# Altium PCB HA_MSS200529PCB.PcbDoc
Units mm, origin at the board's own origin, x right, y up, seen from the top; angles counter-clockwise.
Board outline 55 x 55 mm, 2 copper layers (Top Layer, Bottom Layer), stack 1.569 mm thick; 80 components, 47 nets, 249 pads, 13 vias.
Unrouted connection lines stored in the file: 158.
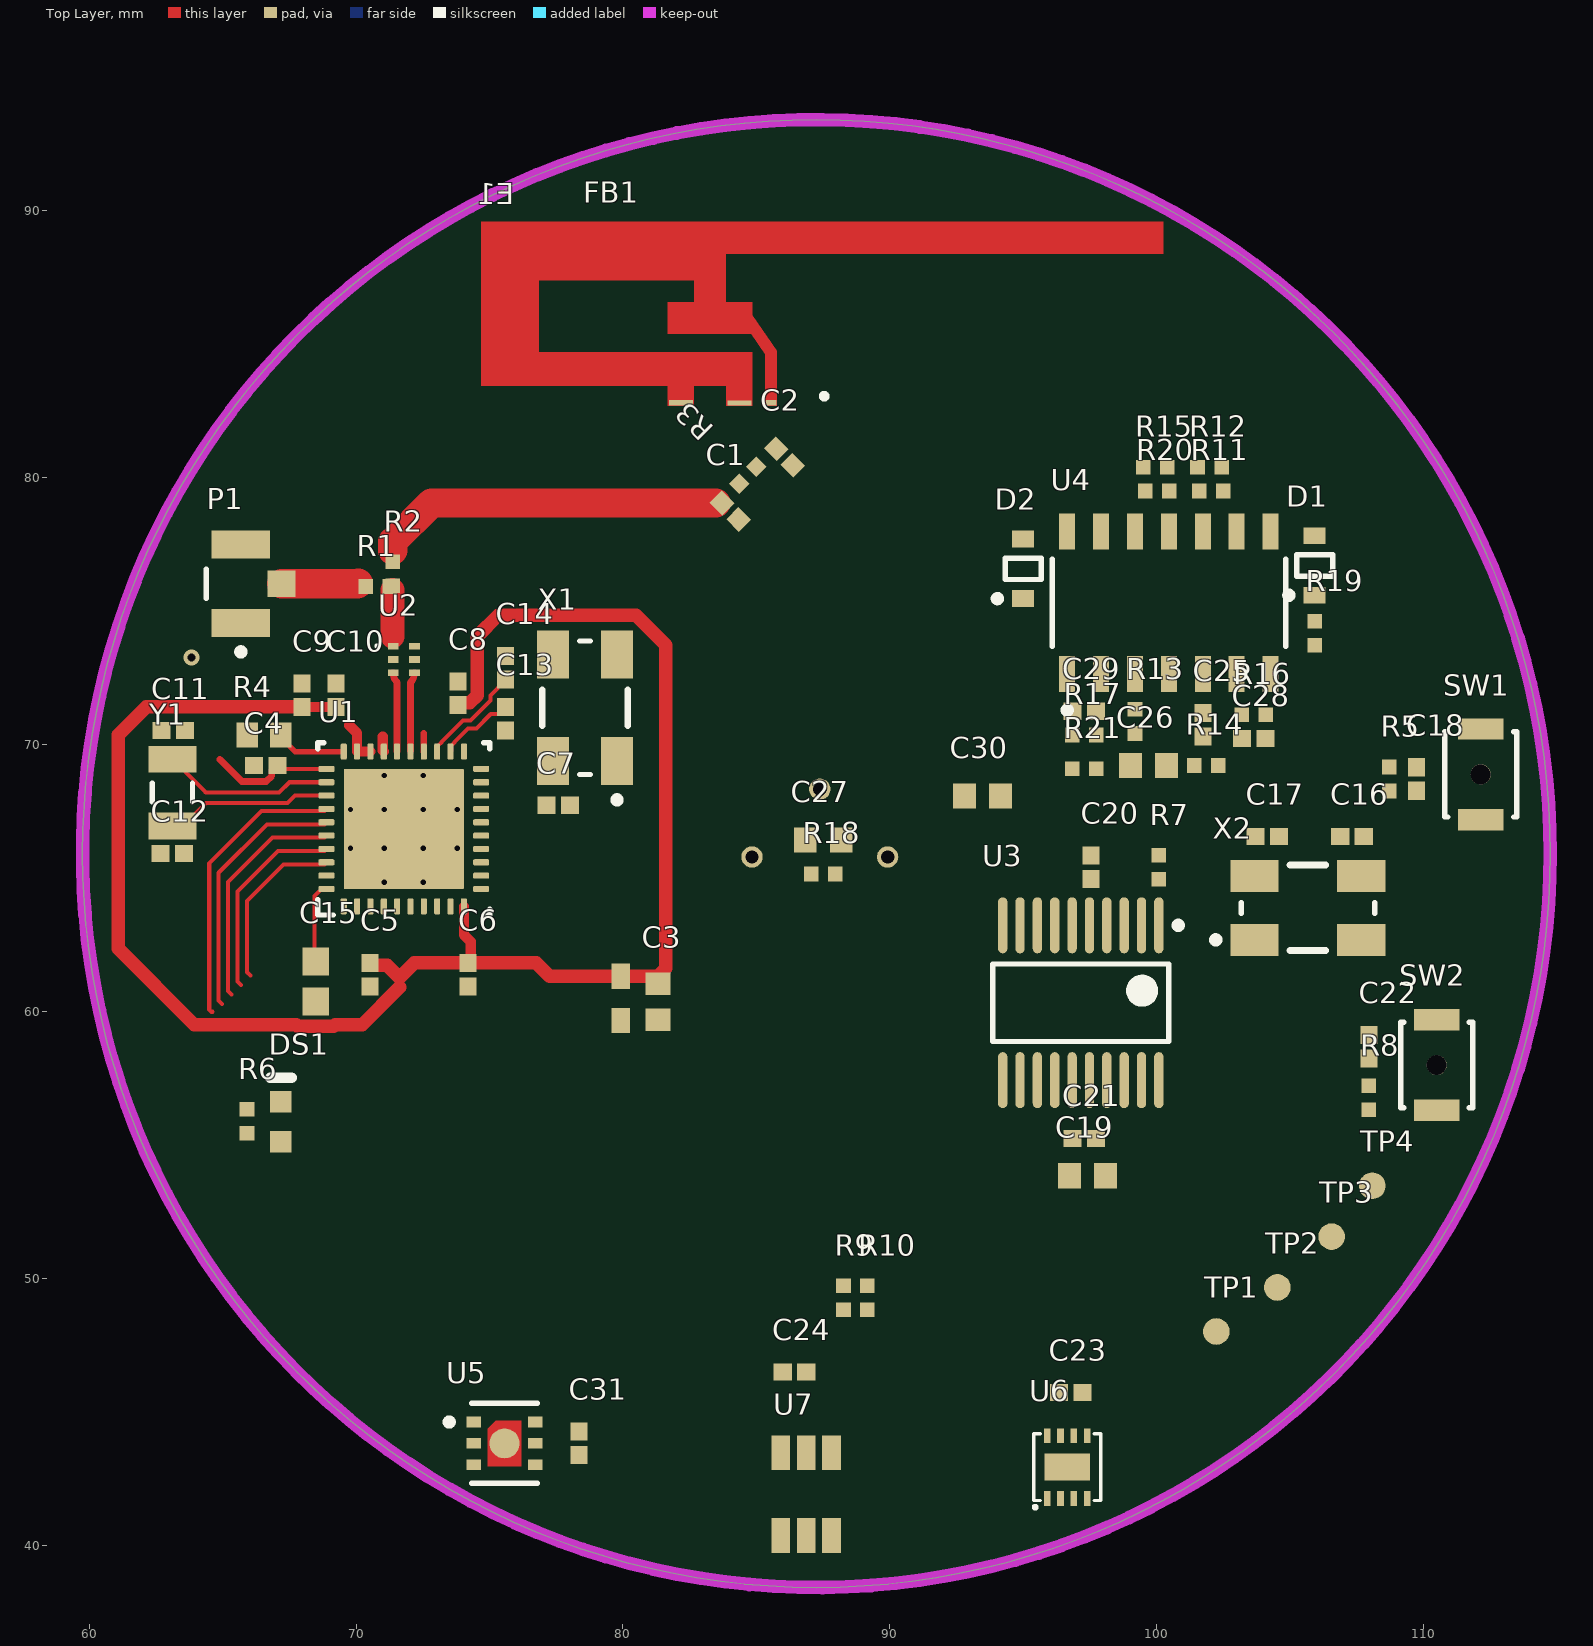
[diagram p0: Top Layer view]
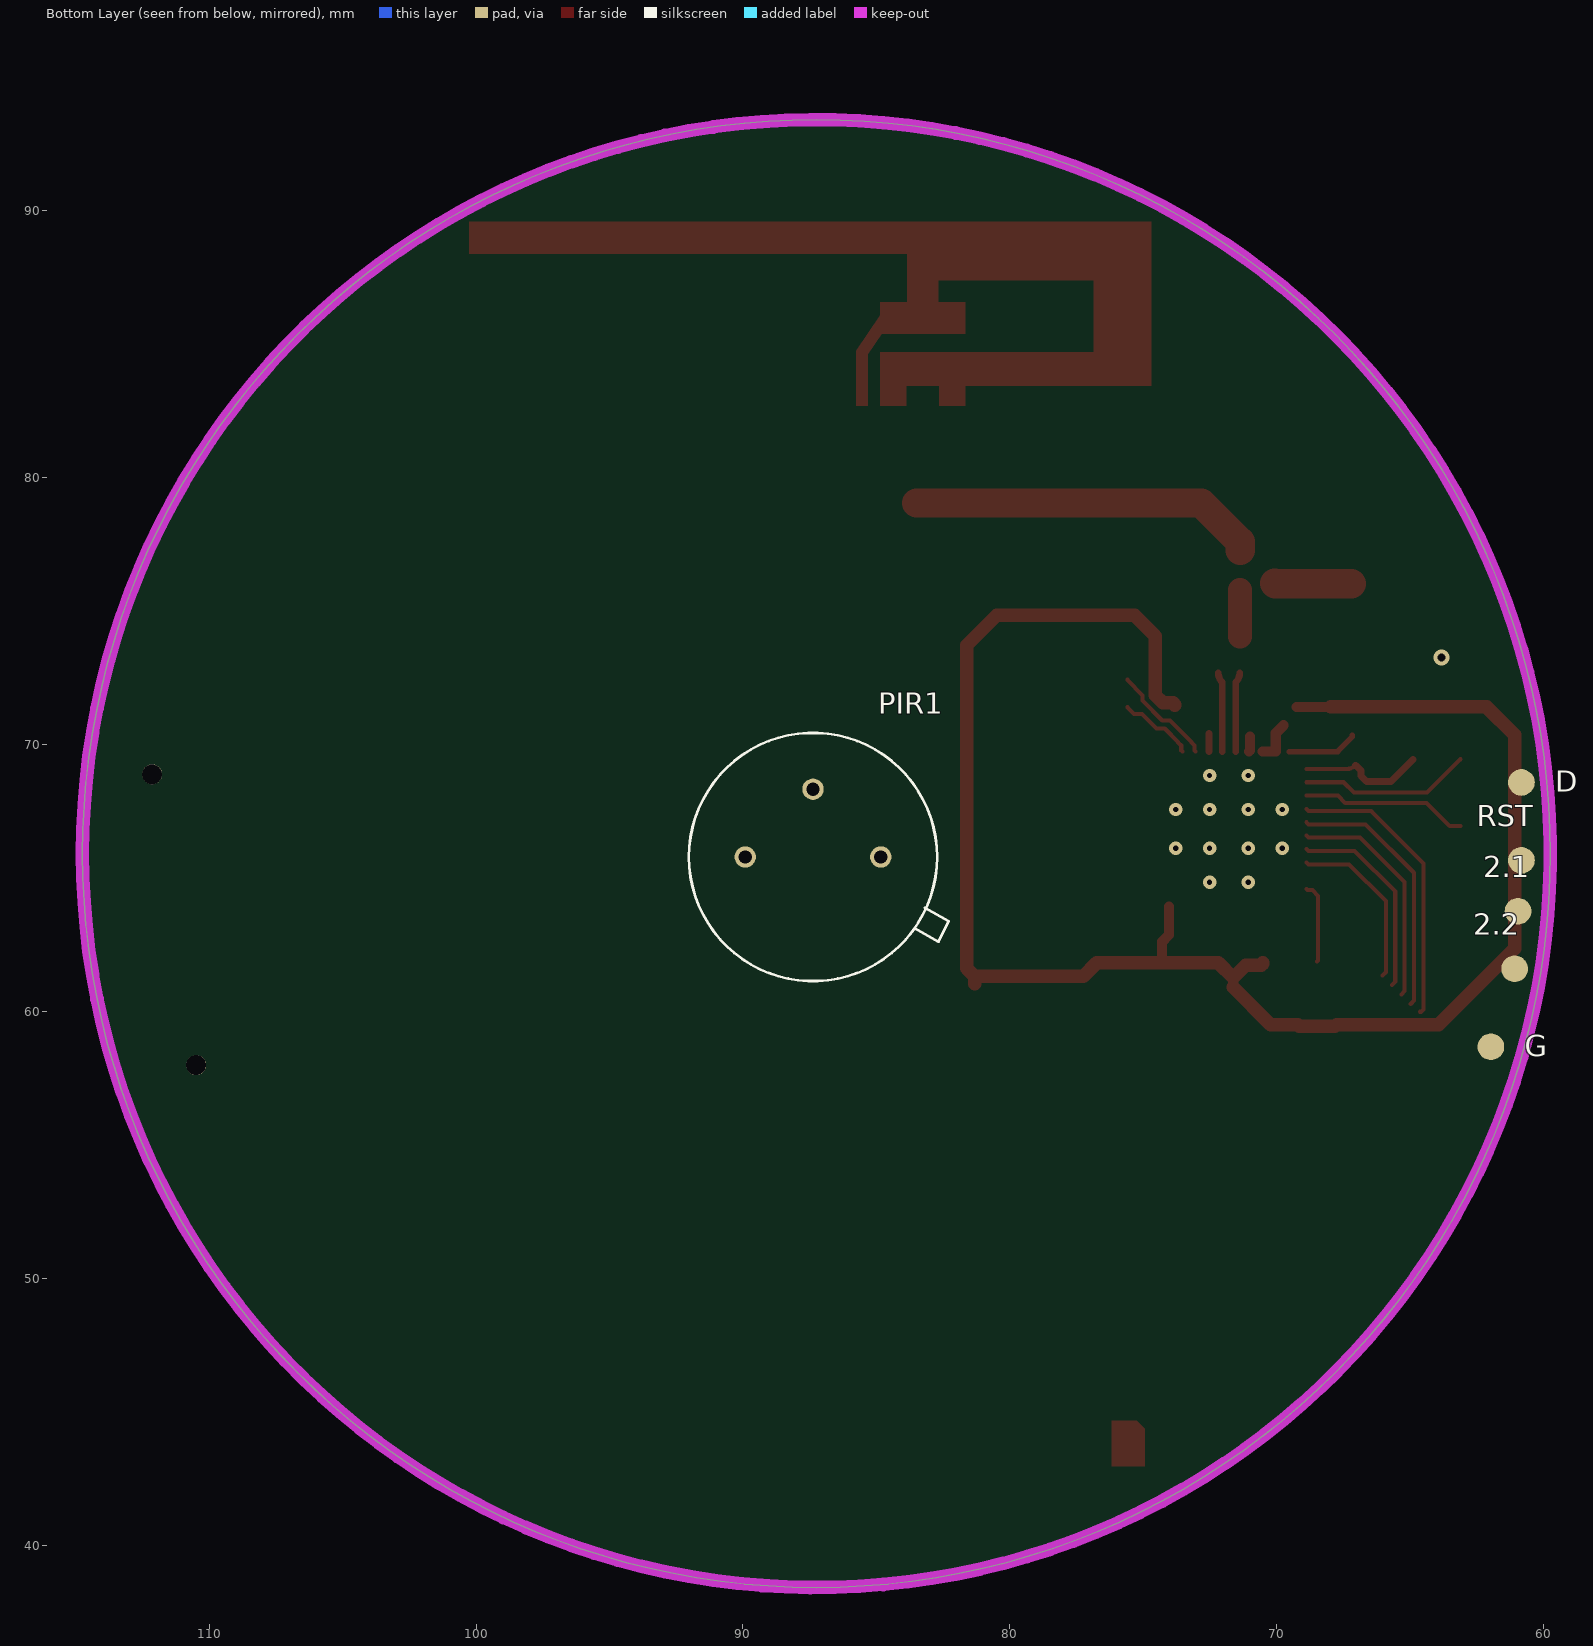
[diagram p1: Bottom Layer view, seen from below]

## Layer stack, top to bottom
Top Solder: solder mask 0.0254, SM-001, Dk 4
Top Layer: signal copper 0.035
Dielectric 1: core 1.4986, Core-043, Dk 4.3
Bottom Layer: signal copper 0.035
Bottom Solder: solder mask 0.0254, SM-001, Dk 4

## Board outline
59.749,65.913 ccw(c87.249,65.913) 87.249,38.413 ccw(c87.249,65.913) 114.749,65.913 ccw(c87.249,65.913) 87.249,93.413 ccw(c87.249,65.913)

## Design rules (kind name [scope] priority, off if disabled: settings)
Clearance [All] p1: gap=0.152 ignorepadtopadclearanceinfootprint=FALSE
PolygonConnect [All] p1: connectstyle=Relief reliefconductorwidth=0.254 reliefentries=4 polygonreliefangle="90 Angle" airgapwidth=0.254
RoomDefinition "04. SENSOR SHT30, PIR, TSL2561" [InComponentClass('04. SENSOR SHT30, PIR, TSL2561')] p1: confinementstyle=ConfineOut formatcopy=TRUE lockcomponents=FALSE outline 60.198,16.129 229.235,16.129 229.235,28.575 60.198,28.575
RoomDefinition "03. MCU" [InComponentClass('03. MCU')] p2: confinementstyle=ConfineOut formatcopy=TRUE lockcomponents=FALSE outline 60.198,31.115 78.232,31.115 78.232,35.687 60.198,35.687
RoomDefinition "02. ZIGBEE CC2530" [InComponentClass('02. ZIGBEE CC2530')] p3: confinementstyle=ConfineOut formatcopy=TRUE lockcomponents=FALSE outline 60.198,1.524 199.771,1.524 199.771,29.972 60.198,29.972
RoutingVias [All] p1: holewidth=0.711 width=1.27 viastyle="Through Hole" minholewidth=0.711 minwidth=1.27 maxholewidth=0.711 maxwidth=1.27
SolderMaskExpansion [All] p1: expansion=0.102 istentingtop=FALSE
Width [All] p1: maxlimit=2.54 minlimit=0.152 preferedwidth=0.254
30 further rules are at their usual default settings.

## Classes and differential pairs
component class "04. SENSOR SHT30, PIR, TSL2561": C23 C24 C25 C26 C27 C28 C29 C30 C31 D1 D2 PIR1 R9 R10 R11 R12 R13 R14 R15 R16 R17 R18 R19 R20 R21 U4 U5 U6 U7
component class "03. MCU": C16 C17 C19 C20 C21 C22 R7 R8 SW2 TP1 TP2 TP3 TP4 U3 X2
component class "02. ZIGBEE CC2530": 2.1 2.2 C1 C2 C3 C4 C5 C6 C7 C8 C9 C10 C11 C12 C13 C14 C15 C18 D DS1 E1 FB1 G P1 R1 R2 R3 R4 R5 R6 RST SW1 U1 U2 X1 Y1

## Components (designator, comment, footprint, x,y, rotation, side; value= is the part's Value field where it differs from the comment)
2.1 "Test Point" TP 60.96,63.754 r90 bottom
2.2 "Test Point" TP 61.087,61.595 r90 bottom
C1 "100nF" CAPC1005X56X25NL10T15 84.023,78.74 r135 top
C2 "100nF" CAPC1005X56X25NL10T15 86.055,80.772 r135 top
C3 "4.7uF" CAPC1608X90X35NL10T15 81.315,60.36 r90 top
C4 "100nF" CAPC1005X56X25NL10T15 66.616,69.215 r0 top
C5 "100nF" CAPC1005X56X25NL10T15 70.52,61.376 r90 top
C6 "100nF" CAPC1005X56X25NL10T15 74.203,61.376 r90 top
C7 "100nF" CAPC1005X56X25NL10T15 77.573,67.726 r180 top
C8 "100nF" CAPC1005X56X25NL10T15 73.822,71.917 r270 top
C9 "100nF" CAPC1005X56X25NL10T15 67.98,71.849 r270 top
C10 "100nF" CAPC1005X56X25NL10T15 69.25,71.849 r270 top
C11 "15pF" CAPC1005X56X25NL10T15 63.154,70.52 r0 top
C12 "15pF" CAPC1005X56X25NL10T15 63.119,65.913 r0 top
C13 "27pF" CAPC1005X56X25NL10T15 75.6,70.968 r90 top
C14 "27pF" CAPC1005X56X25NL10T15 75.6,72.873 r270 top
C15 "06036C225KAT2A" CAPC1608X90X35NL15T15 68.488,61.122 r90 top
C16 "27pF" CAPC1005X56X25NL10T15 107.315,66.548 r180 top
C17 "27pF" CAPC1005X56X25NL10T15 104.14,66.548 r0 top
C18 "100nF" CAPC1005X56X25NL10T15 109.728,68.707 r270 top
C19 "4.7uF" CAPC1608X90X35NL10T15 97.409,53.848 r0 top
C20 "100nF" CAPC1005X56X25NL10T15 97.536,65.405 r270 top
C21 "100nF" CAPC1005X56X25NL10T15 97.282,55.245 r0 top
C22 "100nF" CAPC1005X56X25NL10T15 107.95,58.674 r270 top
C23 "100nF" CAPC1005X56X25NL10T15 96.774,45.72 r0 top
C24 "100nF" CAPC1005X56X25NL10T15 86.428,46.482 r180 top
C25 "100nF" CAPC1005X56X25NL10T15 101.727,70.739 r270 top
C26 "10uF" CAPC1608X90X35NL10T15 99.695,69.215 r180 top
C27 "10uF" CAPC1608X90X35NL10T15 87.503,66.421 r0 top
C28 "100nF" CAPC1005X56X25NL10T15 103.632,70.231 r180 top
C29 "100nF" CAPC1005X56X25NL10T15 97.282,71.247 r0 top
C30 "10uF" CAPC1608X90X35NL10T15 93.472,68.072 r0 top
C31 "100nF" CAPC1005X56X25NL10T15 78.359,43.815 r90 top
D "Test Point" TP 60.833,68.58 r90 bottom
D1 "BAT54HT1G" ONSC-SOD-323-2-477-02_V 105.918,76.708 r90 top
D2 "BAT54HT1G" ONSC-SOD-323-2-477-02_V 94.996,76.581 r90 top
DS1 "HSMA-C190" AVAG-HSMX-C190_V 67.183,55.868 r90 top
E1 "ANTENNA_DN007A" "2.4Ghz TI ANTENNA_DN007A" 85.539,82.804 r180 top net-tie
FB1 "BLM18EG601SN1D" MURA-BLM18-F-H1-CHIP-2_V 79.918,60.487 r90 top
G "Test Point" TP 61.976,58.674 r90 bottom
P1 "U.FL-R-SMT-1(01)" HRS-U.FL-R-SMT-3_V 65.684,76.022 r90 top
PIR1 "D203S" "D203B PIR" 89.916,65.786 r180 bottom locked
R1 "0" RESC1005X40X25NL05T05 70.815,75.921 r0 top
R2 "0" RESC1005X40X25NL05T05 71.374,76.396 r270 top
R3 "0" RESC1005X40X25NL05T05 84.684,80.086 r225 top
R4 "56k 1%" RESC1609X50X30NL10T20 66.548,70.358 r0 top
R5 "10k" RESC1005X40X25NL05T05 108.712,68.707 r270 top
R6 "10k" RESC1005X40X25NL05T05 65.913,55.88 r90 top
R7 "10k" RESC1005X40X25NL05T05 100.076,65.405 r270 top
R8 "10k" RESC1005X40X25NL05T05 107.95,56.769 r270 top
R9 "4k7" RESC1005X40X25NL05T05 88.265,49.276 r90 top
R10 "4k7" RESC1005X40X25NL05T05 89.154,49.276 r90 top
R11 "18k" RESC1005X40X25NL05T05 102.039,79.502 r0 top
R12 "18k" RESC1005X40X25NL05T05 101.981,80.391 r0 top
R13 "18k" RESC1005X40X25NL05T05 99.187,70.866 r270 top
R14 "18k" RESC1005X40X25NL05T05 101.854,69.215 r0 top
R15 "18k" RESC1005X40X25NL05T05 99.949,80.391 r0 top
R16 "18k" RESC1005X40X25NL05T05 103.632,71.12 r0 top
R17 "18k" RESC1005X40X25NL05T05 97.282,70.358 r180 top
R18 "47k" RESC1005X40X25NL05T05 87.503,65.151 r0 top
R19 "1M" RESC1005X40X25NL05T05 105.918,74.168 r90 top
R20 "18k" RESC1005X40X25NL05T05 100.018,79.502 r180 top
R21 "18k" RESC1005X40X25NL05T05 97.282,69.088 r180 top
RST "Test Point" TP 60.833,65.659 r90 bottom
SW1 "B3U-1000P-B" FP-B3U-1000P-B-MFG#1 112.141,68.883 r270 top
SW2 "B3U-1000P-B" FP-B3U-1000P-B-MFG#2 110.49,57.99 r270 top
TP1 "Test Point" TP 102.235,48.006 r90 top
TP2 "Test Point" TP 104.521,49.657 r90 top
TP3 "Test Point" TP 106.553,51.562 r90 top
TP4 "Test Point" TP 108.077,53.467 r90 top
U1 "CC2530F256RHAT" RHA0040H_V 71.79,66.837 r90 top
U2 "LFB182G45BG2D280" MURA-LFB182G45BG5D920-6_V 71.79,73.187 r0 top
U3 "STM32F042F4P6" STM-TSSOP20_M 97.155,60.325 r270 top
U4 "LM324DT" FP-SO-14-MFG 100.457,75.311 r90 top
U5 "SGP30-2.5K" FP-SGP30-2_5K-MFG 75.565,43.815 r0 top
U6 "SHT30-DIS-B" DFN250X250X100-9N 96.647,42.926 r90 top
U7 "OPTICAL-TSL2561T(6P-3.8X2.6MM)" TMB6-1.55-3.8X2.6MM 86.868,41.91 r90 top
X1 "ABM3B-32.000MHZ-B2-T" ABRA-ABM3B_V 78.578,71.377 r90 top
X2 "ABM3B-32.000MHZ-B2-T" ABRA-ABM3B_V 105.664,63.881 r0 top
Y1 "ABS07-120-32.768KHZ-T" ABRA-ABS07_A_V 63.119,68.199 r90 top

## Footprints (in the part's own frame and the unit in brackets; to place one, negate y for a bottom-side part, rotate by r counter-clockwise, add the part's x,y. Pads: shape width x height; smd on the part's side, far side on the other; paste and mask are expansions set on the pad)
"2.4Ghz TI ANTENNA_DN007A" [mm] "SMD, 3-Leads"
  rect 0.4x0.2 smd paste-2 mask-2: 1(-0.007,0)
  rect 0.9x0.2 smd paste-2 mask-2: 2(1.18,0.01) 3(3.37,0)
  Top Layer region: 10.84,-0.63 10.84,-6.775 -14.715,-6.775 -14.715,-5.59 1.685,-5.59 1.685,-3.765 0.685,-3.765 0.685,-3.271 -0.225,-1.951 -0.225,0.11 0.21,0.11 0.21,-1.816 0.737,-2.58 3.86,-2.58 3.86,-3.765 2.86,-3.765 2.86,-4.59 8.685,-4.59 8.685,-1.895 0.685,-1.895 0.685,0.11 1.66,0.11 1.66,-0.63 2.885,-0.63 2.885,0.11 3.86,0.11 3.86,-0.63
  silkscreen extent -2.11,-0.35 -1.91,-0.15
ABRA-ABM3B_V [mm] "SMD, 4-Leads, Body 5x3.2mm"
  rect 1.8x1.2 smd: 1(-2,-1.2) 2(2,-1.2) 3(2,1.2) 4(-2,1.2)
  silkscreen extent -3.57,-1.6 2.5,1.6, body extent -2.5,-1.59 2.5,1.59, height 1.13
ABRA-ABS07_A_V [mm] "SMD, 2-Leads, Body 3.2x1.5mm"
  rect 1x1.8 smd: 1(-1.25,0) 2(1.25,0)
  silkscreen extent -0.35,-0.75 0.35,0.75, body extent -1.6,-0.75 1.6,0.75, height 0.9
AVAG-HSMX-C190_V [mm] "SMD, 2-Leads, Body 1.6x0.8mm, Height 0.9mm"
  rect 0.8x0.8 smd: 1(-0.75,0) 2(0.75,0)
  silkscreen extent 1.65,-0.4 1.65,0.4, body extent -0.8,-0.4 0.8,0.4, height 0.9
CAPC1005X56X25NL10T15 [mm] "Chip Capacitor, 2-Leads, Body 1.00x0.50mm, IPC Medium Density"
  rect 0.68x0.64 smd: 1(-0.44,0) 2(0.44,0)
  body extent -0.55,-0.3 0.55,0.3, height 0.56
CAPC1608X90X35NL10T15 [mm] "Chip Capacitor, 2-Leads, Body 1.60x0.80mm, IPC Medium Density"
  rect 0.85x0.95 smd: 1(-0.675,0) 2(0.675,0)
  body extent -0.85,-0.45 0.85,0.45, height 0.9
CAPC1608X90X35NL15T15 [mm] "Chip Capacitor, 2-Leads, Body 1.60x0.81mm, IPC Medium Density"
  rect 1.05x1 smd: 1(-0.75,0) 2(0.75,0)
  body extent -0.88,-0.48 0.87,0.48, height 0.9
"D203B PIR" [mm]
  round 0.8 hole 0.5: 1(5.08,0) 2(2.54,2.54) 3(0,0)
  silkscreen extent -2.11,-4.65 7.62,4.65
DFN250X250X100-9N [mm]
  rect 0.55x0.25 smd: 1(-1.175,0.75) 2(-1.175,0.25) 3(-1.175,-0.25) 4(-1.175,-0.75) 5(1.175,-0.75) 6(1.175,-0.25) 7(1.175,0.25) 8(1.175,0.75)
  rect 1x1.7 smd: 9(0,0)
  silkscreen extent -1.55,-1.25 1.25,1.25, body extent -1.23,-1.25 1.27,1.25, height 0.91
FP-B3U-1000P-B-MFG#1 [mm]
  rect 0.8x1.7 smd paste+0 mask+0: 1(-1.7,0) 2(1.7,0)
  round 0.75 hole 0.75 unplated paste-1000 mask+0: ""(0,0)
  silkscreen extent -1.6,-1.35 1.6,1.35, body extent -2.2,-1.45 2.2,1.45, height 0.25
FP-B3U-1000P-B-MFG#2 [mm]
  rect 0.8x1.7 smd: 1(-1.7,0) 2(1.7,0)
  round 0.75 hole 0.75 unplated: ""(0,0)
  silkscreen extent -1.6,-1.35 1.6,1.35, body extent -2.2,-1.45 2.2,1.45, height 0.25
FP-SGP30-2_5K-MFG [mm]
  rect 0.55x0.4 smd paste-1000 mask-1000: 1(-1.15,0.8) 2(-1.15,0) 3(-1.15,-0.8) 4(1.15,-0.8) 5(1.15,0) 6(1.15,0.8)
  round 1.125 smd paste-1000 mask+0: 7(0,0)
  Top Layer region: -0.625,-0.85 0.625,-0.85 0.625,0.85 -0.325,0.85 -0.625,0.55
  silkscreen extent -2.2,-1.5 1.22,1.5, body extent -1.63,-1.33 1.63,1.33, height 0.25
FP-SO-14-MFG [mm]
  rect 1.35x0.6 smd: 1(-2.675,3.81) 2(-2.675,2.54) 3(-2.675,1.27) 4(-2.675,0) 5(-2.675,-1.27) 6(-2.675,-2.54) 7(-2.675,-3.81) 8(2.675,-3.81) 9(2.675,-2.54) 10(2.675,-1.27) 11(2.675,0) 12(2.675,1.27) 13(2.675,2.54) 14(2.675,3.81)
  silkscreen extent -4.15,-4.38 1.63,4.38, body extent -3.45,-4.47 3.45,4.47, height 0.25
HRS-U.FL-R-SMT-3_V [mm] "SMT, 3-Leads, Body 2.6x2.6mm"
  rect 1.05x2.2 smd: 1(-1.475,0) 2(1.475,0)
  rect 1x1.05 smd: 3(0,-1.525)
  silkscreen extent -2.67,-0.13 0.55,1.3, body extent -1.3,-1.3 1.3,1.3, height 1.25
MURA-BLM18-F-H1-CHIP-2_V [mm] "Chip Ferrite Bead, 2-Leads, Body 1.6x0.8mm, Height 0.95mm, Flow"
  rect 0.95x0.7 smd: 1(-0.825,0) 2(0.825,0)
  body extent -0.8,-0.4 0.8,0.4, height 0.95
MURA-LFB182G45BG5D920-6_V [mm] "Chip Array, 6-Leads, Body 1.7x0.9mm, Pitch 0.5mm"
  rect 0.4x0.25 smd: 1(-0.4,0.5) 2(-0.4,0) 3(-0.4,-0.5) 4(0.4,-0.5) 5(0.4,0) 6(0.4,0.5)
  silkscreen extent -1.05,0.46 -0.95,0.56, body extent -0.45,-0.85 0.45,0.85, height 0.65
ONSC-SOD-323-2-477-02_V [mm] "SOD, 2-Leads, Body 1.7x1.25mm"
  rect 0.63x0.83 smd: 1(-1.115,0) 2(1.115,0)
  silkscreen extent -1.24,-0.67 0.4,1.09, body extent -0.85,-0.63 0.85,0.63, height 1.06
RESC1005X40X25NL05T05 [mm] "Chip Resistor, 2-Leads, Body 1.05x0.55mm, IPC Medium Density"
  rect 0.55x0.55 smd: 1(-0.45,0) 2(0.45,0)
  body extent -0.53,-0.28 0.53,0.28, height 0.4
RESC1609X50X30NL10T20 [mm] "Chip Resistor, 2-Leads, Body 1.55x0.85mm, IPC Medium Density"
  rect 0.8x0.95 smd: 1(-0.625,0) 2(0.625,0)
  body extent -0.82,-0.48 0.82,0.48, height 0.5
RHA0040H_V [mm] "QFN, 40-Leads, Body 6x6mm, Pitch 0.5mm, Thermal Pad 4.15 x 4.15mm, TI Recommended"
  rrect43% 0.6x0.23 smd mask+0.07: 1(-2.9,2.25) 2(-2.9,1.75) 3(-2.9,1.25) 4(-2.9,0.75) 5(-2.9,0.25) 6(-2.9,-0.25) 7(-2.9,-0.75) 8(-2.9,-1.25) 9(-2.9,-1.75) 10(-2.9,-2.25) 21(2.9,-2.25) 22(2.9,-1.75) 23(2.9,-1.25) 24(2.9,-0.75) 25(2.9,-0.25) 26(2.9,0.25) 27(2.9,0.75) 28(2.9,1.25) 29(2.9,1.75) 30(2.9,2.25)
  rrect43% 0.23x0.6 smd mask+0.07: 11(-2.25,-2.9) 12(-1.75,-2.9) 13(-1.25,-2.9) 14(-0.75,-2.9) 15(-0.25,-2.9) 16(0.25,-2.9) 17(0.75,-2.9) 18(1.25,-2.9) 19(1.75,-2.9) 20(2.25,-2.9) 31(2.25,2.9) 32(1.75,2.9) 33(1.25,2.9) 34(0.75,2.9) 35(0.25,2.9) 36(-0.25,2.9) 37(-0.75,2.9) 38(-1.25,2.9) 39(-1.75,2.9) 40(-2.25,2.9)
  rrect2% 4.5x4.5 smd paste-2.5: 41(0,0)
  silkscreen extent -3.22,-3.22 3.22,3.22, body extent -3.08,-3.08 3.08,3.08, height 1.01
STM-TSSOP20_M [mm] "SOP, 20-Leads, Body 6.6x4.5mm, Pitch 0.65mm, IPC Low Density"
  oval 2.1x0.35 smd: 1(-2.9,2.925) 2(-2.9,2.275) 3(-2.9,1.625) 4(-2.9,0.975) 5(-2.9,0.325) 6(-2.9,-0.325) 7(-2.9,-0.975) 8(-2.9,-1.625) 9(-2.9,-2.275) 10(-2.9,-2.925) 11(2.9,-2.925) 12(2.9,-2.275) 13(2.9,-1.625) 14(2.9,-0.975) 15(2.9,-0.325) 16(2.9,0.325) 17(2.9,0.975) 18(2.9,1.625) 19(2.9,2.275) 20(2.9,2.925)
  silkscreen extent -3.02,-3.3 1.45,3.78, body extent -2.25,-3.3 2.25,3.3, height 1.2
TMB6-1.55-3.8X2.6MM [mm]
  rect 1.3x0.7 smd: 1(-1.55,0.95) 2(-1.55,0) 3(-1.55,-0.95) 4(1.55,-0.95) 5(1.55,0) 6(1.55,0.95)
TP [mm]
  round 1 smd: 1(0,0)

## Part data
2.1 2.2 D G RST TP1 TP2 TP3 TP4: library part TP
C1 C2 C4 C5 C6 C7 C8 C9 C10 C18 C20 C21 C22 C23 C24 C25 C28 C29 C31: library part CMP-2008-02743-1, Manufacturer="AVX Interconnect / Elco", Part Number=04026D104KAT2A
C3 C19: library part CMP-2006-02545-1, Manufacturer=Murata, Part Number=GRM188R6YA475KE15D
C11 C12 C13 C14 C16 C17: library part CMP-2008-02620-1, Manufacturer="AVX Interconnect / Elco", Part Number=04025A270FAT2A
C15: library part CMP-2006-04473-1, Manufacturer="AVX Interconnect / Elco", Part Number=06036C225KAT2A
C26 C27 C30: library part CMP-2006-02792-1, Manufacturer=Murata, Part Number=GRM188R60J106ME47D
D1 D2: library part CMP-1055-00462-1, "Schottky Barrier Diode, 2-Pin SOD-323, Pb-Free, Tape and Reel", Manufacturer="On Semiconductor", ComponentLink1Description="Manufacturer URL", ComponentLink1URL=http://www.onsemi.com/, ComponentLink2Description=Datasheet, ComponentLink2URL=http://www.onsemi.cn/pub_link/Collateral/BAT54HT1-D.PDF, ComponentLink3Description="Package Specification", ComponentLink3URL=http://www.onsemi.com/pub_link/Collateral/477-02.PDF.1, Configuration=Single, DatasheetVersion="Rev. 6", IFSM Max (A)=0.6, Mounting Technology="Surface Mount", PackageDescription="2-Pin SOD, Body 1.7 x 1.25 mm", PackageReference=SOD-323-2-477-02, PackageVersion="Rev. H, 03/2007", Packing="Tape and Reel", PartNumber=BAT54HT1G, RoHS=TRUE, trr Max (ns)=5
DS1: library part CMP-1744-00005-1, "LED Uni-Color Amber, 60 mW, 20 mA, -40 to 85 degC, 2-Pin SMD, RoHS, Tape and Reel", Capacitance="1.25E-11 f", Frequency="32.768 KHz", Frequency Tolerance=20ppm, Load Capacitance="12.5 pF", Max Operating Temperature=85degC, Min Operating Temperature=-40degC, Package Quantity=1, Resistance="70000 Ohm", ComponentLink1Description="Manufacturer URL", ComponentLink1URL=http://www.avagotech.com/, ComponentLink2Description=Datasheet, ComponentLink2URL=http://docs.avagotech.com/docs/AV02-0112EN, ComponentLink3Description="Package Specification", ComponentLink3URL=http://www.fairchildsemi.com/dwg/MA/MA03D.pdf, DatasheetVersion=Sep-10, ESR="70 kohm", Height="0.033 inch", Length="0.126 inch", Mount="Surface Mount", PackageDescription="2-Pin Surface Mount Device, Body 1.6 x 0.8 mm, Height 0.9 mm", PackageReference=HSMX-C190, Packaging="Tape and Reel", Pins=2, REACH SVHC="No SVHC", RoHSCompliant=True, Tolerance=20ppm, Width="0.059 inch"
E1: "2.4GHz PCB Antenna.  There is nothing to buy or mount.", Manufacturer=N/A, ComponentLink1Description="Datasheet Link", ComponentLink1URL=https://sps06.itg.ti.com/sites/KMS/crossdivteams/altium/docs/ComponentDatasheets/CC26xxEM-7IB_1_0_Layout.pdf, CompType=Antenna, LatestRevisionDate=2015-12-09, MountType=N/A, PackageReference="SMD, 3-Leads", PartNumber=ANTENNA_DN007A, Publisher="Texas Instruments", SymbolCreator=a0412235, SymbolVersion=2014-08-14
FB1: library part CMP-0686-00354-2, "Chip Ferrite Bead for GHz Band General Use (Low DC Resistance Type), 600 Ohm, 500 mA, -55 to 125 degC, 1.6 x 0.8 x 0.95 mm SMD, Tape and Reel", DC Resistance="0.35 Ohm Max.", Manufacturer=Murata, Operating Temperature Range="-55 to 125 degC", Rated Current="500 mA", ComponentLink1Description="Manufacturer URL", ComponentLink1URL=http://www.murata.com/, ComponentLink2Description=Datasheet, ComponentLink2URL=http://www.murata.com/products/catalog/pdf/c31e.pdf, ComponentLink3Description="Package Specification", ComponentLink3URL=http://www.murata.com/products/catalog/pdf/c31e.pdf, DatasheetVersion=08/2013, Impedance (at 100 MHz)="600 Ohm +/- 25%", Mounting Technology="Surface Mount", PackageDescription="2-Pin Chip, Body 1.6 x 0.8 mm", PackageReference=BLM18_H950-2, Packing="Tape and Reel", PartNumber=BLM18EG601SN1D
P1: library part CMP-2000-05153-1, "Ultra Small Coaxial Connector, 6 GHz, -40 to 90 degC, 3-Pin SMD, RoHS, Bulk", Dielectric Material=LiquidCrystalPolymer(LCP), Frequency - Max=6GHz, Housing Color=Silver, Manufacturer="Hirose Electric", Operating Temperature=-40degC~90degC, Package Description="3-Pin Surface Mount Device, Body 2.6 x 2.6 mm", Package Reference=U.FL-R-SMT, Standard Package=100, Body Finish=Silver, Body Material=PhosphorBronze, Category=Connectors,Interconnects, Center Contact Material=PhosphorBronze, Center Contact Plating=Gold, Connector Style=U.FL, Connector Type=Jack,MalePin, Contact Termination=Solder, Datasheet URL=https://datasheet.ciiva.com/26945/getdatasheetpartid-475239-26945414.pdf, Datasheet Version=Feb-09, Dynamic Catalog=U.FLSeries, Family=CoaxialConnectors(RF), Fastening Type=Snap-On, Featured Product=HiroseU.FLSeries, Impedance=50Ohm, Manufacturer URL=https://www.hirose.com, Minimum Quantity=UltraMiniatureCoaxial, Mounting Type=SurfaceMount, Online Catalog=U.FLSeries, Other Names="H122041 / U.FL-R-SMT-1(01)-ND", Packaging=Bulk, Quantity Available=Bulk, Series=U.FL, Shield Termination=Solder, Unit PriceUSD=U.FL
R1 R2 R3 R5 R6 R7 R8 R9 R10 R11 R12 R13 R14 R15 R16 R17 R18 R19 R20 R21: library part CMP-2000-07588-1, "Chip Resistor, 10 KOhm, +/- 1%, 0.1 W, -55 to 155 degC, 0402 (1005 Metric), RoHS, Tape and Reel", Case Code (Imperial)=0402, Case Code (Metric)=1005, Manufacturer=Panasonic, Max Operating Temperature=155degC, Max Power Dissipation=100mW, Min Operating Temperature=-55degC, Package Description="2-Pin Surface Mount Device, Body 1 x 0.5 mm", Package Quantity=1, Package Reference=402, Resistance=10KOhm, Temperature Coefficient=100ppm\/degreesC, Tolerance=1%, Voltage Rating=50V, Case\/Package=0402, Composition=ThickFilm, Contact Plating=Tin, Datasheet URL=https://industrial.panasonic.com/cdbs/www-data/pdf/RDA0000/AOA0000C304.pdf, Datasheet Version=02/2017, Depth=0.5mm, Height=0.35mm, Lead Free=LeadFree, Length=1mm, Manufacturer URL=http://www.panasonic.com/, Military Standard=Not, Mount=SurfaceMount, Mounting Technology=SurfaceMount, Number of Pins=2, Number of Terminations=2, Packaging=TapeandReel, Power Rating=100mW, Radiation Hardening=No, REACH SVHC=NoSVHC, RoHSCompliant=True, Termination=SMD/SMT, Voltage Rating (DC)=50V, Width=0.02inch
R4: library part CMP-2000-03467-1, Manufacturer="Vishay Dale", Part Number=CRCW060356K0FKEA
SW1 SW2: library part CMP-08834-000005-1, "SWITCH TACTILE SPST-NO 0.05A 12V", Ambient Temperature Range High=+70°C, Ambient Temperature Range Low=-25°C, Contact Current Rating=50mA, Contact Resistance=100mΩ, Manufacturer=Omron, Operating Force=1.5N, Package=0, Temperature="-25°C to +70°C", Voltage Rating Dc=12V, Automotive=No, Category=Switch, ComponentLink2Description=Datasheet, ComponentLink2URL=https://omronfs.omron.com/en_US/ecb/products/pdf/en-b3u.pdf, Device Class L1=Electromechanical, Device Class L2=Switches, Device Class L3="Tactile Switches", Digikey Description="SWITCH TACTILE SPST-NO 0.05A 12V", Electromechanical Life=200000Cycles, Height=1.75mm, Lead Free=Yes, Manufacturer Part Number=B3U-1000P-B, Mount="Surface Mount", Mouser Description="Tactile Switches Top Actuated with boss w/o ground", Octopart=https://octopart.com/b3u-1000p-b-omron-1057356, RoHS=TRUE, Temperature Range High=+70°C, Temperature Range Low=-25°C, Throw Configuration=SPST-NO
U1: library part CMP-0458-00002-3, "CC2530 System-on-Chip Solution for 2.4-GHz IEEE 802.15.4 and ZigBee Applications", Frequency Range=2.4GHz, Manufacturer="Texas Instruments", Operating Voltage (Max) (V)=3.6, Operating Voltage (Min) (V)=2, Pin/Package=40VQFN, RX Current (Lowest) (mA)=20.5, Standby Current (uA)=0.4, TX Power (dBm)=4.5, Antenna Connection=Differential, ComponentLink1Description="Manufacturer URL", ComponentLink1URL=http://www.ti.com/, ComponentLink2Description=Datasheet, ComponentLink2URL=http://www.ti.com/lit/ds/symlink/cc2530.pdf, ComponentLink3Description="Package Specification", ComponentLink3URL=http://www.ti.com/lit/ml/mpqf135c/mpqf135c.pdf, Data Rate (Max) (kbps)=250, DatasheetVersion=SWRS081B, Device Type=System-on-Chip, Flash size (KB)=256, Modulation Techniques=DSSS, Mounting Technology="Surface Mount", PackageDescription="40-Pin Quad Flat No-Lead Package, Body 6 x 6mm, Pitch 0.5mm", PackageReference=RHA0040H, PackageVersion=4204276/E, PartNumber=CC2530F256RHAT, RAM Size (KB)=8, Sensitivity (Best) (dBm)=-97, Wakeup Time (PD-->RX/TX) (us)=600
U2: library part CMP-2000-06539-1, "Balance Matching Band Pass Filter, -40 to 85 degC, 6-Pin SMD, RoHS, Tape and Reel", Frequency=2.4GHz, Frequency Range=2.4GHzto2.5GHz, Manufacturer=Murata, Operating Temperature Range=-40Cto+85C, Package / Case=0603(1608metric), Package Description="6-Pin Chip Array, Body 1.6 x 0.8 mm, Pitch 0.5 mm", Bandwidth=2.45GHz, Brand=MurataElectronics, Datasheet URL=http://www.murata.com/~/media/webrenewal/products/balun/balun/forconnectivity/lfb182g45bg2d280.ashx?la=en, Datasheet Version=01/2016, Factory Pack Quantity=4000, Impedance=50Ohms, Insertion Loss=0.75dB, Manufacturer URL=http://www.murata.com/, Mounting Technology=SurfaceMount, Package Reference=LFB182G45BG2D280, Packaging=Reel, PartNumber=LFB182G45BG2D280, Product=BandPassFilters, Product Category=SignalConditioning, RoHS=Details, Series=LFB, Termination Style=SMD/SMT, Type=BandPassFilter
U3: library part CMP-0304-00106-2, "ARM Cortex-M0 32-bit MCU, 16 KB Flash, 6 KB Internal RAM, 16 I/Os, 20-Pin TSSOP, -40 to 85 degC, Tray", I/Os (High Current)=16, Manufacturer=STMicroelectronics, Operating Frequency(F) (Processor speed) (MHz)=48, Package Description="20-Pin Thin Shrink Small Outline Package, Body 6.5 x 4.4 mm, Pitch 0.65 mm", Package Reference=TSSOP20, Supply Voltage(Vcc) min (V)=2, ComponentLink1Description="Manufacturer URL", ComponentLink1URL=http://www.st.com/, ComponentLink2Description=Datasheet, ComponentLink2URL=http://www.st.com/st-web-ui/static/active/en/resource/technical/document/datasheet/DM00105814.pdf, Core="ARM Cortex-M0", DatasheetVersion="Rev. 5", FLASH Size (Prog) (kB)=16, Internal RAM Size (kB)=6, Mounting Technology="Surface Mount", Packing=Tray, PartNumber=STM32F042F4P6
U4: library part CMP-12131-000005-1, "IC OPAMP GP 4 CIRCUIT 14SO", Input Bias Current=0.02uA, Input Offset Voltage=2mV, Manufacturer=STMicroelectronics, Max Dual Supply Voltage=15V, Max Junction Temp=+150°C, Max Supply Voltage=30V, Min Dual Supply Voltage=1.5V, Min Supply Voltage=3V, Nominal Supply Current=0.7-1.5mA, Output Current Per Channel=20-50mA, Package=SO-14, Temperature="0°C to +70°C", Temperature Range High=+70°C, Temperature Range Low=0°C, Voltage Gain=100dB, Automotive=No, Bandwidth=1.3MHz, Category=IC, ComponentLink2Description=Datasheet, ComponentLink2URL=https://www.st.com/content/ccc/resource/technical/document/datasheet/bd/fc/46/43/26/8f/40/7f/CD00001046.pdf/files/CD00001046.pdf/jcr:content/translations/en.CD00001046.pdf, Device Class L1="Integrated Circuits (ICs)", Device Class L2="Linear ICs", Device Class L3="Amplifiers - Op Amps", Digikey Description="IC OPAMP GP 4 CIRCUIT 14SO", Footprint Url=https://www.st.com/content/ccc/resource/technical/document/datasheet/group3/10/8a/e6/12/f8/e8/49/ce/DM00366438/files/DM00366438.pdf/jcr:content/translations/en.DM00366438.pdf, Gain Bandwidth=1.3MHz, Height=1.75mm, Lead Free=Yes, Manufacturer Part Number=LM324DT, Mouser Description="LM324 Series 32 V 1.3 MHz Low Power Quad Operational Amplifier - SOIC-14", Number Of Channels=4, Octopart=https://octopart.com/lm324dt-stmicroelectronics-39579146, RoHS=TRUE, Standoff Height=0.1mm
U5: library part CMP-144026-000002-1, "AIR QUALITY GAS SENSOR FOR VOC'S", Manufacturer=Sensirion, Max Supply Voltage=1.98V, Min Supply Voltage=1.62V, Operating Supply Current=48.8mA, Temperature="-40°C to +85°C", Temperature Range High=+85°C, Temperature Range Low=-40°C, Automotive=No, Category=IC, ComponentLink2Description=Datasheet, ComponentLink2URL=https://www.sensirion.com/fileadmin/user_upload/customers/sensirion/Dokumente/0_Datasheets/Gas/Sensirion_Gas_Sensors_SGP30_Datasheet.pdf, Device Class L1=Sensors, Device Class L2=unset, Device Class L3=unset, Digikey Description="AIR QUALITY GAS SENSOR FOR VOC'S", Height=0.9mm, Lead Free=Yes, Manufacturer Part Number=SGP30-2.5K, Octopart=https://octopart.com/sgp30-2.5k-sensirion-84561789, Package=SGP30-2.5K, RoHS=TRUE, Sensor Output=I2C
U6: "Humidity Temperature Sensor 0 ~ 100% RH IÂ²C Â±3% RH 8s Surface Mount", Package="DFN-8 Sensirion", Availability=Unavailable, MF="Sensirion AG", MP=SHT30-DIS-B, Price=None, SnapEDA_Link=https://www.snapeda.com/parts/SHT30-DIS-B/Sensirion%20AG/view-part/231868/?ref=snap
U7: "Optical Sensor Ambient 640nm IÂ²C 6-SMD, No Lead", Package="SMD-6 ams", Availability=Unavailable, MF=ams, MP=TSL2561T, Price=None, SnapEDA_Link=https://www.snapeda.com/parts/TSL2561T/ams/view-part/225280/?ref=snap
X1 X2: library part CMP-1688-00002-1, "Ceramic SMD Crystal, 8 MHz, +/- 20 ppm, 200 Ohm, -20 to 70 degC, 4-Pin SMD, RoHS, Tape and Reel", Max Operating Temperature="85 degC", Max Supply Voltage="45 V", Min Operating Temperature="-40 degC", Min Supply Voltage="8.2 V", Output Current="1.8 A", Output Voltage="3.3 V", Package Quantity=50, Switching Frequency="30 KHz", ComponentLink1Description="Manufacturer URL", ComponentLink1URL=http://www.abracon.com/, ComponentLink2Description=Datasheet, ComponentLink2URL=http://www.abracon.com/Resonators/abm3b.pdf, DatasheetVersion=Aug-15, Height="1.05 mm", Length="9.8 mm", Mount="Surface Mount", Outputs=4, PackageDescription="4-Pin Surface Mount Device, Body 5 x 3.2 mm", PackageReference=ABM3B, Packaging=Rail/Tube, Pins=28, Radiation Hardening=No, REACH SVHC="No SVHC", RoHSCompliant=true, Weight="0.004233 oz", Width="4.5 mm"
Y1: library part CMP-2000-07587-1, "Tuning Fork Crystal, 32.768 KHz, +/- 20 ppm, -40 to 85 degC, 2-Pin SMD, RoHS, Tape and Reel", Case\/Package=SMD/SMT, ESR (Equivalent Series Resistance)=55KOhm, Frequency=32.768KHz, Frequency Tolerance=20ppm, Load Capacitance=6pF, Manufacturer=Abracon, Max Operating Temperature=85degC, Min Operating Temperature=-40degC, Package Description="2-Pin Surface Mount Device, Body 3.2 x 1.5 mm", Package Quantity=3000, Package Reference=ABS07, Series Resistance=60KOhm, Datasheet URL=http://www.abracon.com/Resonators/ABS07-120-32.768kHz-T.pdf, Datasheet Version=11/2014, Depth=1.5mm, Height=0.035inch, Lead Free=LeadFree, Length=3.2mm, Manufacturer URL=http://www.abracon.com/, Mount=SurfaceMount, Mounting Technology=SurfaceMount, Number of Pins=2, Packaging=TapeandReel, Radiation Hardening=No, REACH SVHC=NoSVHC, RoHSCompliant=True, Termination=SMD/SMT, Tolerance=20ppm, Width=0.061inch

## Via types
v1: diameter 0.5, hole 0.2, Top Layer to Bottom Layer, 12 vias
v2: diameter 0.6, hole 0.3, Top Layer to Bottom Layer, 1 vias

## Nets (pads, with @x,y where several pads share a name; then routed paths per layer and width w, separated by ;. In a path a pad name is that pad's centre, name@x,y a point inside that pad or via, vN(x,y) a via of type N, cw(c..) or ccw(c..) an arc to the next point about the centre after c; other vN are vias at no path point)
32K_IN: C11.1 U1.33 Y1.1 | length 6.2
  Top Layer w0.152: Y1.1 63.519,66.949 64.385,67.815 67.434,67.815 67.706,68.087 U1.33
32K_OUT: C12.1 U1.32 Y1.2 | length 6.4
  Top Layer w0.152: Y1.2 64.369,68.199 67.111,68.199 67.498,68.586 U1.32
32M_IN: C13.2 U1.22 X1.1 | length 2.9
  Top Layer w0.152: U1.22 73.578,69.775 73.578,69.96 73.696,70.078 73.696,70.102 74.197,70.603 74.505,70.603 75.047,71.145 75.356,71.145 75.6,71.389 C13.2
32M_OUT: C14.2 U1.23 X1.3 | length 3.9
  Top Layer w0.152: U1.23 73.078,69.775 73.078,69.96 73.196,70.078 73.196,70.102 74.002,70.908 74.29,70.908 75.031,71.648 75.031,71.844 75.6,72.413 C14.2
+3V3: C19.2 C20.2 C21.2 C23.2 C24.2 C27.1 D.1 DS1.1 FB1.1 PIR1.1 R5.2 R8.1 R9.2 R10.2 R11.2 TP1.1 U3.5 U3.16 U4.4 U5.1 U6.5 U7.1
GND: C1.1 C2.1 C3.1 C4.1 C5.1 C6.1 C7.1 C8.1 C9.1 C10.1 C11.2 C12.2 C13.1 C14.1 C15.1 C16.1 C17.1 C18.1 C19.1 C20.1 C21.1 C22.1 C23.1 C24.1 C25.2 C27.2 C30.1 C31.1 E1.2 E1.3 G.1 P1.1 P1.2 PIR1.3 R4.1 R7.1 R18.2 R19.1 R20.1 SW1.1 SW2.1 TP4.1 U1.1 U1.2 U1.3 U1.4 U1.41 U2.2 U2.5 U2.6 U3.15 U4.11 U5.2 U5.4 U5.7 U6.7 U6.8 U6.9 U7.3 X1.2 X1.4 X2.2 X2.4
  other v1: 71.062,64.836 72.517,64.836 69.789,66.109 71.062,66.109 72.517,66.109 73.79,66.109 69.789,67.564 71.062,67.564 72.517,67.564 73.79,67.564 71.062,68.837 72.517,68.837
LED: R6.1 U1.36 | length 8.7
  Top Layer w0.152: 65.333,60.634 65.206,60.761 65.206,64.842 66.874,66.51 68.813,66.51 U1.36
NetC1_2: C1.2 R2.1 R3.2 | length 13
  Top Layer w1.1: 71.374,77.285 71.374,77.597 72.828,79.051 C1.2@83.482,79.051
NetC2_2: C2.2 E1.1 R3.1
NetC3_2: C3.2 C4.2 C5.2 C6.2 C7.2 C8.2 C9.2 C10.2 FB1.2 U1.10 U1.21 U1.24 U1.27 U1.28 U1.29 U1.31 U1.39 | length 74.4
  Top Layer w0.152: C4.2 ccw(c67.366,69.525) 67.366,69.087 U1.31
  Top Layer w0.254: 64.897,69.439 65.72,68.616 66.632,68.616 66.843,68.827 66.843,69.022 67.036,69.215 C4.2 ; U1.24 72.539,70.418
  Top Layer w0.381: C9.2 C10.2 ; 69.743,70.72 70.039,70.423 U1.29 U1.28 ; 70.997,70.296 70.997,69.779 U1.27 ; 71.631,60.902 71.631,61.262 ; U1.10 74.04,62.866 74.295,62.611 74.295,61.908 C6.2
  Top Layer w0.508: C9.2 62.138,71.409 61.087,70.358 61.087,62.357 63.94,59.504 67.756,59.504 67.819,59.44 69.156,59.44 69.219,59.504 70.233,59.504 71.631,60.902 ; C5.2 70.52,61.796 70.586,61.73 71.164,61.73 71.631,61.262 72.184,61.816 C6.2 76.75,61.816 77.254,61.312 FB1.2 C3.2@81.315,61.312 ; C8.2 73.822,71.496 73.888,71.563 74.262,71.563 74.548,71.848 74.548,74.064 75.326,74.842 80.489,74.842 81.612,73.719 81.612,61.609 C3.2@81.315,61.312 ; C3.2 C3.2@81.315,61.312
NetC15_2: C15.2 U1.40 | length 3
  Top Layer w0.152: C15.2 68.45,61.909 68.45,64.332 68.666,64.548 68.851,64.548 U1.40
NetC16_2: C16.2 U3.3 X2.1
NetC17_2: C17.2 U3.2 X2.3
NetC18_2: C18.2 R5.1 SW1.2 U1.19
NetC25_1: C25.1 R12.1 R15.2 U4.5
NetC26_1: C26.1 R14.1
NetC26_2: C26.2 C29.1 R17.2 U4.1
NetC28_1: C28.1 R16.2 U4.7 U4.9 U4.13
NetC28_2: C28.2 R14.2 R16.1 U4.6
NetC29_2: C29.2 R17.1 R21.1 U4.2
NetC30_2: C30.2 R21.2
NetC31_2: C31.2 U5.5
NetD1_1: D1.1 D2.1 R19.2
NetD1_2: D1.2 U4.8
NetD2_2: D2.2 U4.14
NetDS1_2: DS1.2 R6.2
NetP1_3: P1.3 R1.1 | length 2.9
  Top Layer w1.1: P1.3 70.053,76.022 70.079,76.048
NetPIR1_2: PIR1.2 R13.2 R18.1
NetR1_2: R1.2 R2.2 U2.1 | length 1.8
  Top Layer w0.9: 71.374,74.041 R1.2@71.374,75.794
NetR4_2: R4.2 U1.30 | length 2.7
  Top Layer w0.203: R4.2 67.173,70.283 67.72,69.737 U1.30
NetR7_2: R7.2 U3.1
NetR9_1: R9.1 U3.18 U5.3 U6.1 U7.6
NetR10_1: R10.1 U3.17 U5.6 U6.4 U7.4
NetR11_1: R11.1 R12.2 U4.10
NetR13_1: R13.1 U4.3
NetR15_1: R15.1 R20.2 U4.12
NetU1_5: U1.5 U3.6
NetU1_6: U1.6 U3.7
NetU1_25: U1.25 U2.4 | length 3
  Top Layer w0.254: U1.25 72.04,72.324 ccw(c71.677,72.686) U2.4@72.19,72.686
NetU1_26: U1.26 U2.3 | length 3
  Top Layer w0.254: U2.3 ccw(c71.899,72.686) 71.539,72.326 U1.26@71.539,69.737
NetU1_37: U1.37 U3.8 | length 7.5
  Top Layer w0.152: 65.686,60.987 65.559,61.114 65.559,64.489 67.081,66.01 68.813,66.01 U1.37
NetU1_38: U1.38 U3.9 | length 6.4
  Top Layer w0.152: 66.04,61.341 65.913,61.468 65.913,64.135 67.288,65.51 68.813,65.51 U1.38
P2.1: 2.1.1 U1.35 | length 9.8
  Top Layer w0.152: 64.979,60.28 64.852,60.407 64.852,65.196 66.667,67.01 68.813,67.01 U1.35
P2.2: 2.2.1 U1.34 | length 10.9
  Top Layer w0.152: 64.626,59.986 64.588,59.986 64.499,60.075 64.499,65.549 66.46,67.51 68.813,67.51 U1.34
SWCK: TP3.1 U3.20
SWDO: TP2.1 U3.19
Z_RST: C22.2 R8.2 RST.1 SW2.2 U1.20 U3.4
pads on no net: SW1. SW2. U1.7 U1.8 U1.9 U1.11 U1.12 U1.13 U1.14 U1.15 U1.16 U1.17 U1.18 U3.10 U3.11 U3.12 U3.13 U3.14 U6.2 U6.3 U6.6 U7.2 U7.5
copper on no net:
  other v2: 63.83,73.254

## Polygon pours and split planes (outlines as drawn)
no net on Top Layer "NONET_L01_P000" (solid, pour order 0): 15.494,44.577

## Keep-outs
Keep-Out Layer:
  circle w0.508: c87.249,65.913 r27.5

## Other copper
Top Layer:
  pour cut-out: 71.311,93.909 71.311,82.606 103.188,82.606 103.188,93.797
  pour cut-out: 69.469,94.107
  pour cut-out: 67.945,95.631

## Text inside footprints (layer, text, board x,y; h text height)
FB1: Mechanical 6 "Land Pattern Adapted for Flow Soldering" at 79.318,59.487 h0.8 r90